# Altium PCB V_4.PcbDoc
Units mm, origin at the board's own origin, x right, y up, seen from the top; angles counter-clockwise.
Board outline 152.4 x 101.6 mm, 2 copper layers (Top Layer, Bottom Layer); 6 components, 10 nets, 78 pads, 4 vias.
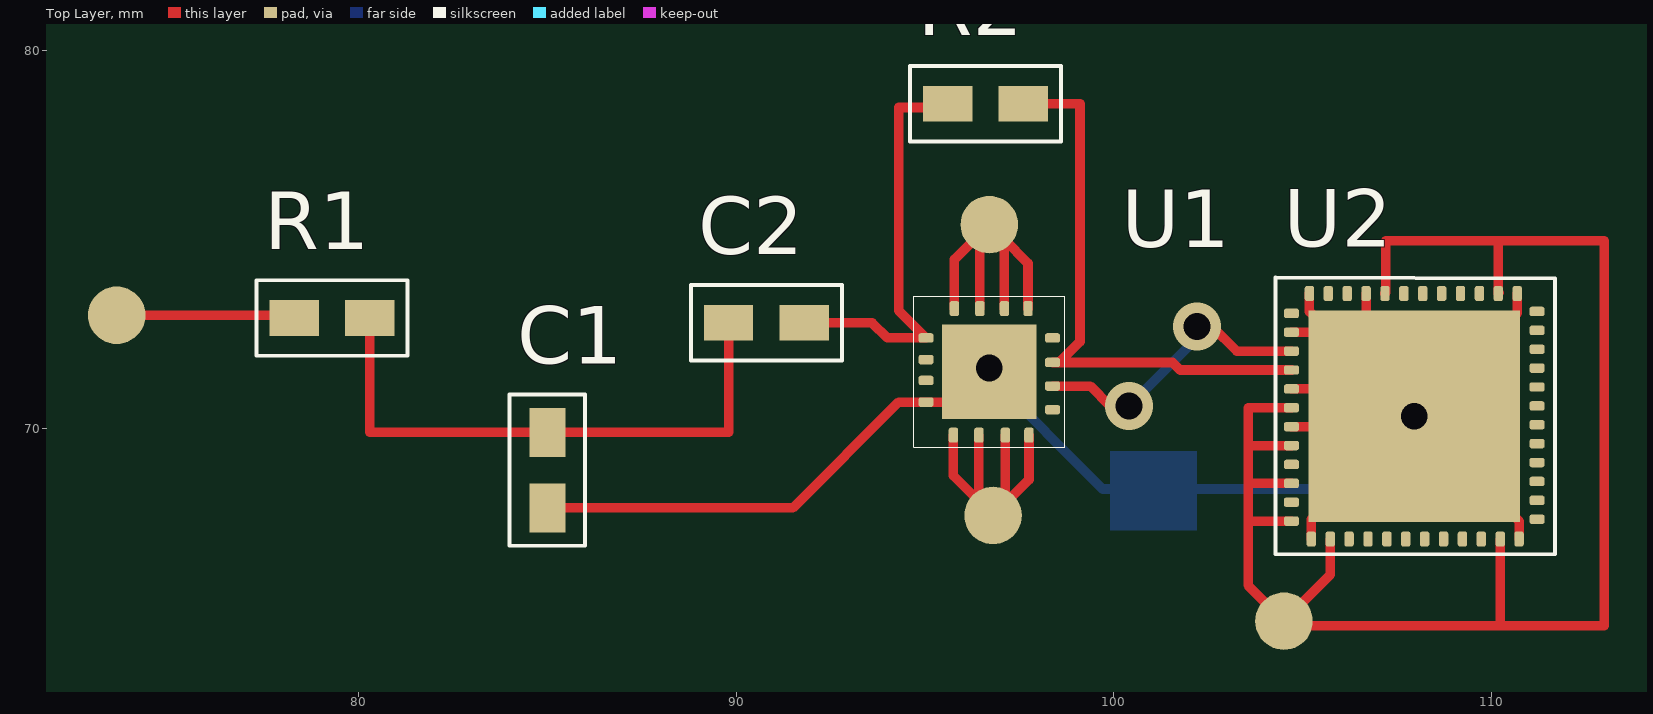
[diagram p0: Top Layer view]
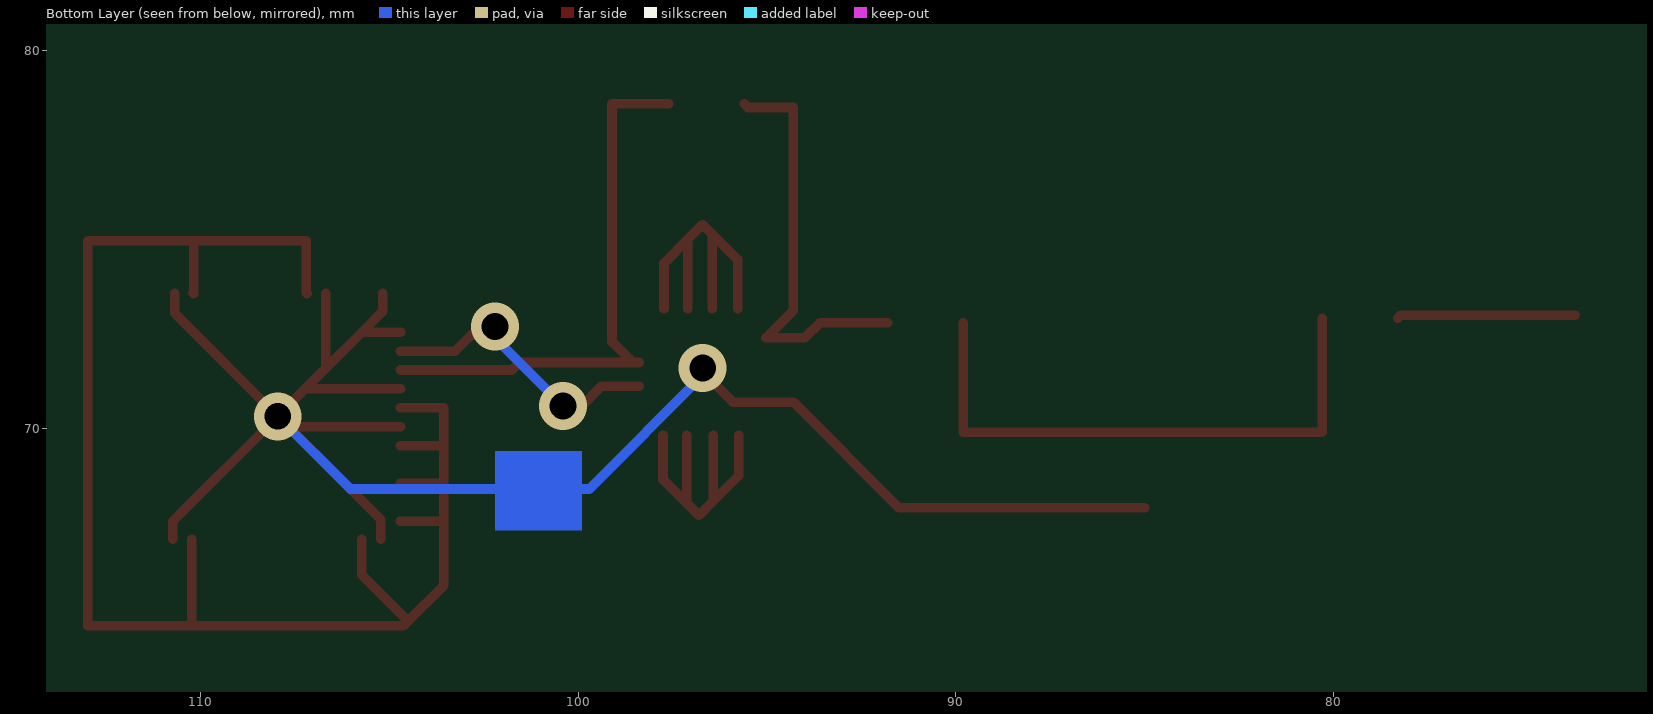
[diagram p1: Bottom Layer view, seen from below]

## Layer stack, top to bottom
Top Solder: solder mask 0.0102, Solder Resist, Dk 3.5
Top Layer: signal copper 0.0356
Dielectric 1: dielectric 0.32, FR-4, Dk 4.8
Bottom Layer: signal copper 0.0356
Bottom Solder: solder mask 0.0102, Solder Resist, Dk 3.5

## Board outline
25.4,25.4 177.8,25.4 177.8,127 25.4,127

## Design rules (kind name [scope] priority, off if disabled: settings)
Clearance [All] p1: gap=0.1 ignorepadtopadclearanceinfootprint=TRUE except(0: Arc-Hole Track-Hole SMDPad-Hole THPad-Hole Via-Hole Fill-Hole Poly-Hole Region-Hole Text-Hole)
PolygonConnect [All] p1: connectstyle=Relief reliefconductorwidth=0.254 reliefentries=4 polygonreliefangle="90 Angle" airgapwidth=0.254
RoutingVias [All] p1: holewidth=0.711 width=1.27 viastyle="Through Hole" minholewidth=0.711 minwidth=1.27 maxholewidth=0.711 maxwidth=1.27
SolderMaskExpansion [All] p1: expansion=0.102
Width [All] p1: maxlimit=0.254 minlimit=0.254 preferedwidth=0.254
30 further rules are at their usual default settings.

## Components (designator, comment, footprint, x,y, rotation, side; value= is the part's Value field where it differs from the comment)
C1 "2p2" C0805 85,67.9 r90 top
C2 "2p2" C0805 89.8,72.8 r0 top
R1 "6k8" R0805 79.3,72.9 r0 top
R2 "2k2" R0805 96.6,78.575 r0 top
U1 "Oper  Ampl" ADA 96.725,71.45 r0 top
U2 "ADC" ADS 107.95,70.35 r270 top

## Footprints (in the part's own frame and the unit in brackets; to place one, negate y for a bottom-side part, rotate by r counter-clockwise, add the part's x,y. Pads: shape width x height; smd on the part's side, far side on the other; paste and mask are expansions set on the pad)
ADA [mm]
  rect 2.5x2.5 smd: 17(-0.025,0.05)
  rrect50% 0.4x0.25 smd: 18(-1.7,0.95) 19(-1.7,0.375) 20(-1.7,-0.175) 21(-1.7,-0.75) 24(1.65,0.3) 24(1.65,0.95) 25(1.65,-0.325) 25(1.65,-0.95)
  rrect50% 0.25x0.4 smd: 22(-0.975,-1.625) 22(-0.3,-1.625) 22(0.4,-1.625) 22(1.025,-1.625) 23(-0.95,1.725) 23(-0.275,1.725) 23(0.375,1.725) 23(1,1.725)
  silkscreen extent -2.02,-1.95 1.98,2.05
ADS [mm]
  rrect50% 0.4x0.25 smd: 26(-3.225,2.725) 27(-3.225,2.225) 28(-3.225,1.725) 29(-3.225,1.225) 30(-3.225,0.725) 31(-3.225,0.225) 32(-3.225,-0.275) 33(-3.225,-0.775) 34(-3.225,-1.275) 35(-3.225,-1.775) 36(-3.225,-2.275) 37(-3.225,-2.775) 50(3.275,-2.725) 51(3.275,-2.225) 52(3.275,-1.725) 53(3.275,-1.225) 54(3.275,-0.725) 55(3.275,-0.225) 56(3.275,0.275) 57(3.275,0.775) 58(3.275,1.275) 59(3.275,1.775) 60(3.275,2.275) 61(3.275,2.775)
  rrect50% 0.25x0.4 smd: 38(-2.7,-3.25) 39(-2.2,-3.25) 40(-1.7,-3.25) 41(-1.2,-3.25) 42(-0.7,-3.25) 43(-0.2,-3.25) 44(0.3,-3.25) 45(0.8,-3.25) 46(1.3,-3.25) 47(1.8,-3.25) 48(2.3,-3.25) 49(2.8,-3.25) 62(2.75,3.25) 63(2.25,3.25) 64(1.75,3.25) 65(1.25,3.25) 66(0.75,3.25) 67(0.25,3.25) 68(-0.25,3.25) 69(-0.75,3.25) 70(-1.25,3.25) 71(-1.75,3.25) 72(-2.25,3.25) 73(-2.75,3.25)
  rect 5.6x5.6 smd: 74(0.025,0)
  silkscreen extent -3.65,-3.67 3.68,3.72
C0805 [mm]
  rect 1.3x0.95 smd: 2(0,0) 3(2,0)
  silkscreen extent -1,-1 3,1
R0805 [mm]
  rect 1.3x0.95 smd: 0(-1,0.025) 1(1,0.025)
  silkscreen extent -2,-0.98 2,1.02

## Part data
C1 C2: library part Capasitor
R1 R2: library part Resistor

## Free pads (board coordinates)
  round 1.524 smd: 17(73.6,73) 18(96.7,75.4) 19(96.8,67.7) 23(104.5,64.9)

## Via types
v1: diameter 1.27, hole 0.711, Top Layer to Bottom Layer, 4 vias

## Nets (pads, with @x,y where several pads share a name; then routed paths per layer and width w, separated by ;. In a path a pad name is that pad's centre, name@x,y a point inside that pad or via, vN(x,y) a via of type N, cw(c..) or ccw(c..) an arc to the next point about the centre after c; other vN are vias at no path point)
1.8V: 
3.3V: pad.23 U2.27 U2.33 U2.43 U2.45 U2.47 U2.49 U2.51 U2.60 | length 43.1
  Top Layer w0.254: U2.49 103.6,67.55 103.55,67.5 ; U2.47 103.6,68.55 103.55,68.6 ; U2.45 103.6,69.55 103.55,69.5 ; U2.43 103.55,70.55 103.55,69.5 ; U2.51 105.725,66.125 pad.23 ; U2.33 107.2,73.6 107.2,74.975 110.1,74.975 ; U2.27@110.2,73.6 U2.27 110.175,74.9 110.1,74.975 ; U2.60 110.225,64.775 ; 103.55,67.5 103.55,68.6 ; 103.55,67.5 103.55,65.85 pad.23 ; 103.55,68.6 103.55,69.5 ; pad.23 104.625,64.775 110.225,64.775 ; 110.1,74.975 112.975,74.975 112.975,64.775 110.225,64.775
+5V: pad.18 U1.23 | length 9.1
  Top Layer w0.254: U1.23@95.775,73.175 95.775,74.475 pad.18@96.45,75.15 ; U1.23@96.45,73.175 pad.18@96.45,75.15 ; U1.23@97.1,73.175 pad.18@97.1,75 ; U1.23@97.725,73.175 97.725,74.375 pad.18@97.1,75 ; pad.18@96.45,75.15 pad.18 pad.18@97.1,75
-5V: pad.19 U1.22 | length 8.6
  Top Layer w0.254: U1.22@95.75,69.825 95.75,68.75 pad.19@96.425,68.075 ; U1.22@96.425,69.825 pad.19@96.425,68.075 ; U1.22@97.125,69.825 pad.19@97.125,68.025 ; U1.22@97.75,69.825 97.75,68.65 pad.19@97.125,68.025 ; pad.19@96.425,68.075 pad.19 pad.19@97.125,68.025
GND: C1.2 U1.17 U1.21 U2.26 U2.34 U2.37 U2.39 U2.42 U2.44 U2.50 U2.61 U2.74 | length 52.7
  Top Layer w0.254: C1.2 91.5,67.9 94.3,70.7 U1.21 95.9,70.7 U1.17 ; U2.44 U2.74@107.675,70.05 ; U2.42 U2.74@107.225,71.05 ; U2.39 U2.74@105.725,72.55 ; U2.37 105.175,73.1 U2.74@105.725,72.55 ; U2.50 105.225,67.6 U2.74@107.675,70.05 ; U2.34 U2.74@106.675,71.6 ; U2.26 110.675,73.05 v1(107.95,70.325) ; U2.61 110.725,67.55 v1(107.95,70.325) ; U2.74@105.725,72.55 U2.74@106.675,71.6 ; U2.74@106.675,71.6 U2.74@107.225,71.05 ; U2.74@107.225,71.05 v1(107.95,70.325) ; U2.74@107.675,70.05 v1(107.95,70.325)
  Bottom Layer w0.254: v1(96.7,71.6) 96.7,71.4 99.7,68.4 106.025,68.4 v1(107.95,70.325)
NetC1_3: C1.3 C2.2 R1.1 | length 15.4
  Top Layer w0.254: R1.1 80.3,69.9 C1.3 89.8,69.9 C2.2
NetC2_3: C2.3 R2.0 U1.18 | length 11.1
  Top Layer w0.254: C2.3 93.6,72.8 94,72.4 U1.18 94.3,73.125 94.3,78.5 95.5,78.5 R2.0
NetR1_0: pad.17 R1.0 | length 4.7
  Top Layer w0.254: pad.17 78.225,73 R1.0
NetR2_1: R2.1 U1.24@98.375,71.75 U2.41 | length 15
  Top Layer w0.254: R2.1 99.1,78.6 99.1,72.3 U1.24@98.55,71.75 ; U1.24@98.375,71.75 U1.24@98.55,71.75 ; U2.41 101.75,71.55 101.55,71.75 U1.24@98.55,71.75
NetU1_25: U1.25@98.375,71.125 U2.40 | length 7.9
  Top Layer w0.254: U1.25@98.375,71.125 99.375,71.125 99.9,70.6 v1(100.4,70.6) ; v1(102.2,72.7) 102.6,72.7 103.25,72.05 U2.40
  Bottom Layer w0.254: v1(100.4,70.6) 102.2,72.4 v1(102.2,72.7)
pads on no net: U1.19 U1.20 U1.24@98.375,72.4 U1.25@98.375,70.5 U2.28 U2.29 U2.30 U2.31 U2.32 U2.35 U2.36 U2.38 U2.46 U2.48 U2.52 U2.53 U2.54 U2.55 U2.56 U2.57 U2.58 U2.59 U2.62 U2.63 U2.64 U2.65 U2.66 U2.67 U2.68 U2.69 U2.70 U2.71 U2.72 U2.73

## Other copper
Bottom Layer:
  rectangle net GND: 99.9,67.3 102.2,69.4